# Altium PCB AB_Amplifier.PcbDoc
Units mil, origin at the board's own origin, x right, y up, seen from the top; angles counter-clockwise.
Board outline 2973.75 x 1470 mil, 2 copper layers (Top Layer, Bottom Layer); 24 components, 15 nets, 53 pads, 0 vias.
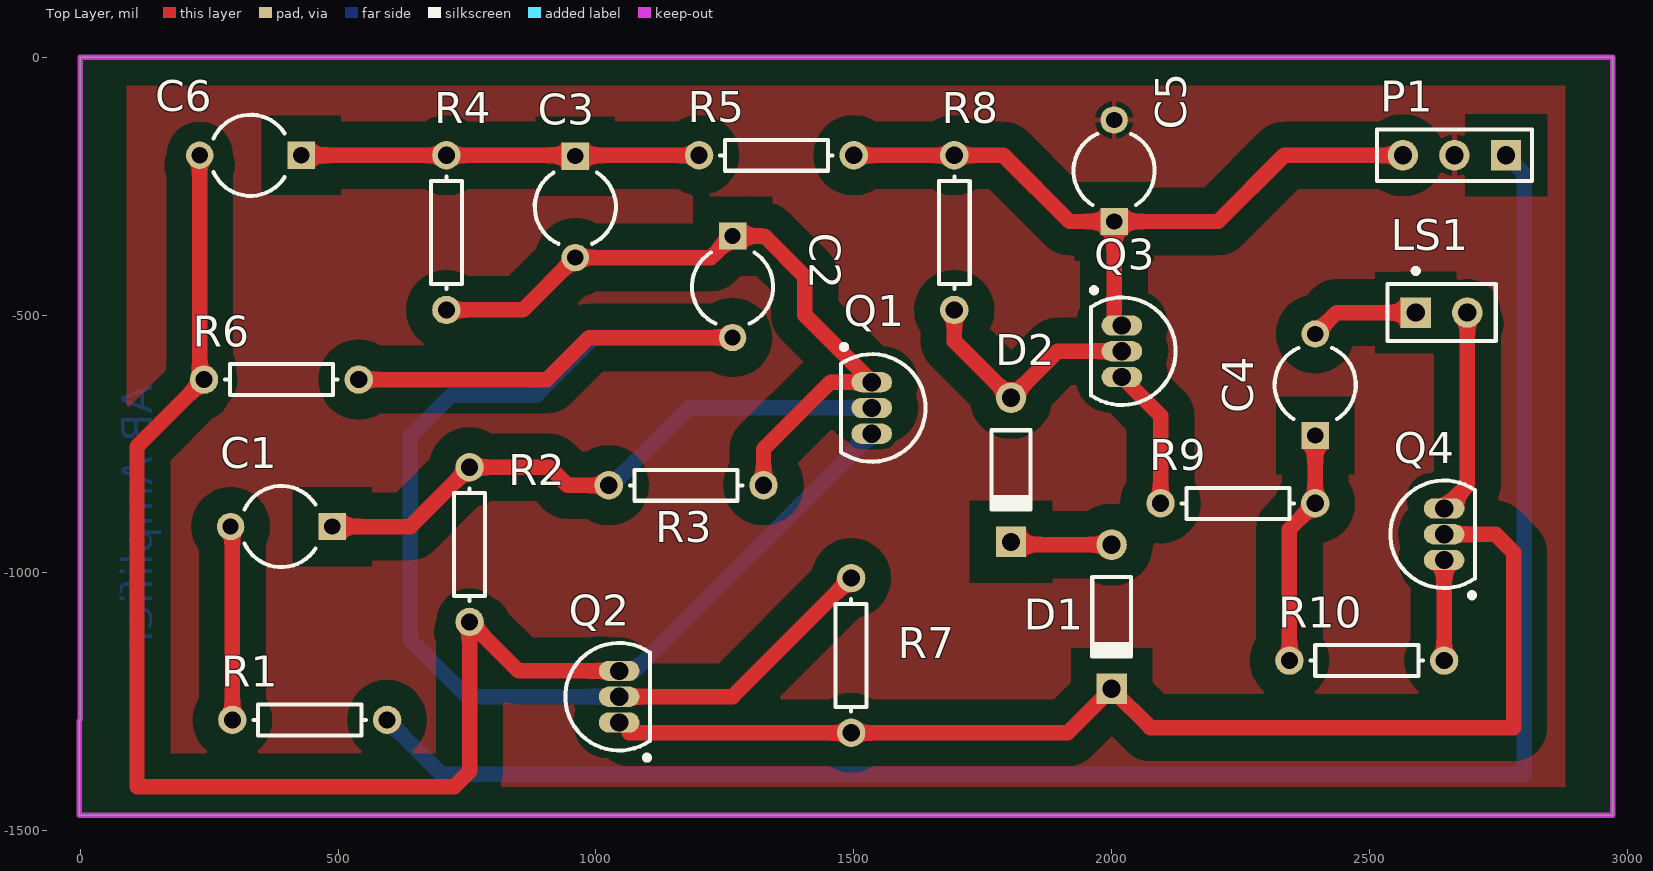
[diagram p0: Top Layer view]
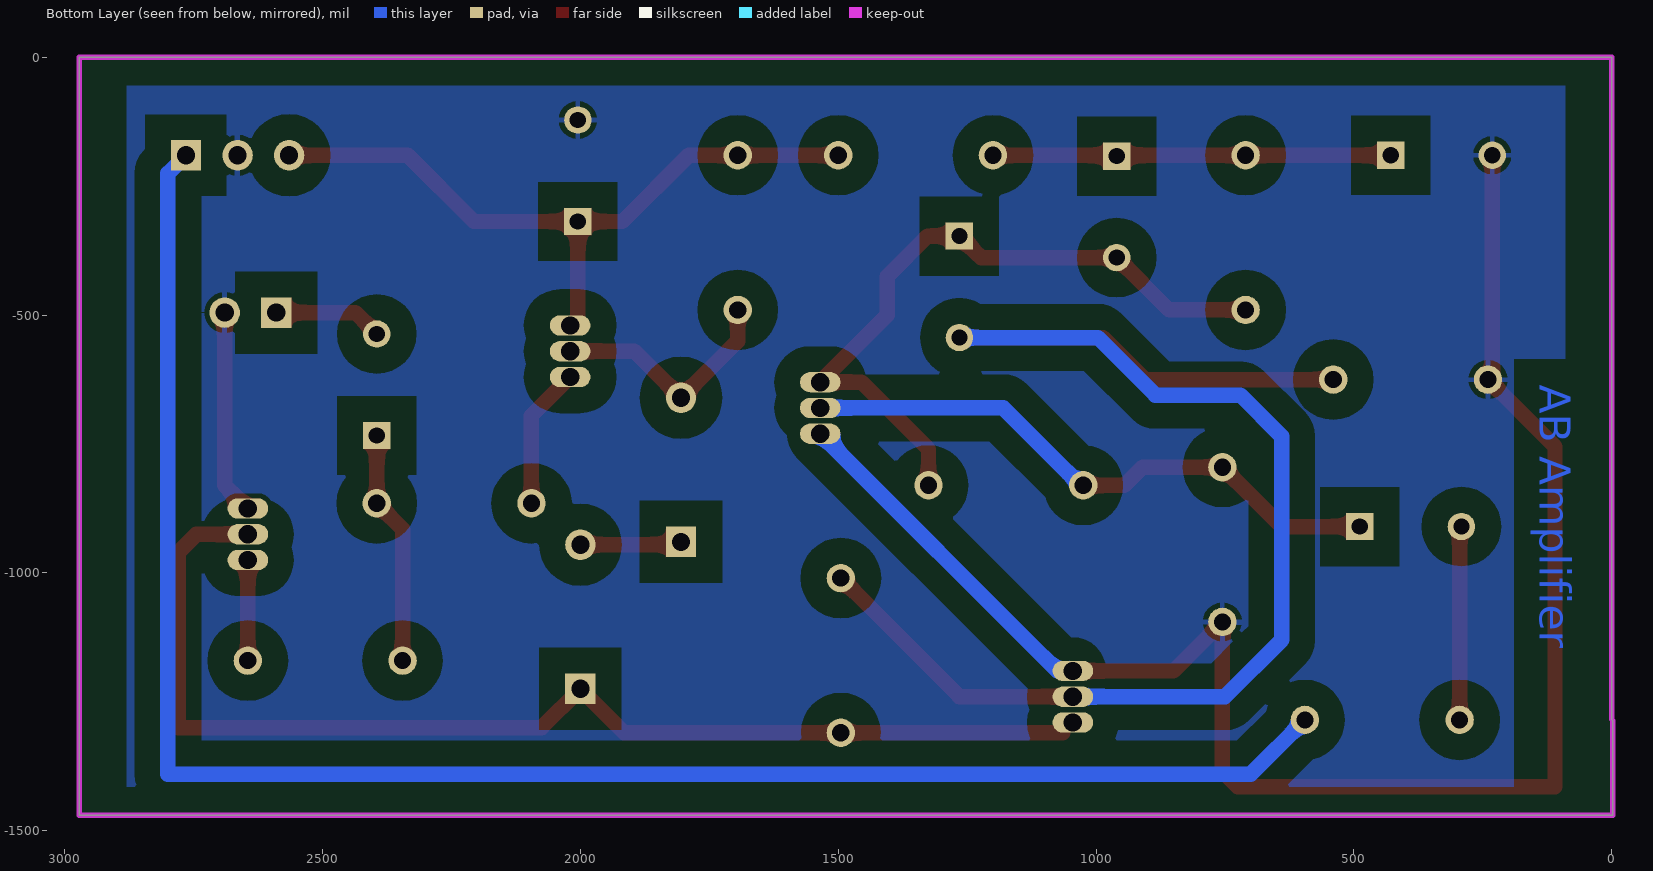
[diagram p1: Bottom Layer view, seen from below]

## Layer stack, top to bottom
Top Solder: solder mask 0.4, Solder Resist, Dk 3.5
Top Layer: signal copper 1.4
Dielectric 1: dielectric 12.6, FR-4, Dk 4.8
Bottom Layer: signal copper 1.4
Bottom Solder: solder mask 0.4, Solder Resist, Dk 3.5

## Board outline
-1.88,-1470 -1.88,-1286.25 0,-1284.38 0,0 2971.88,0 2971.88,-1470

## Design rules (kind name [scope] priority, off if disabled: settings)
Clearance "Copper Pour" [InPolygon] p1: gap=50
Clearance [All] p2: gap=10
PolygonConnect [All] p1: connectstyle=Relief reliefconductorwidth=10 reliefentries=4 polygonreliefangle="90 Angle" airgapwidth=10
RoutingVias [All] p1: holewidth=28 width=50 viastyle="Through Hole" minholewidth=28 minwidth=50 maxholewidth=28 maxwidth=50
SolderMaskExpansion [All] p1: expansion=4
Width "GND net width" [InNet('GND')] p1: maxlimit=30 minlimit=10 preferedwidth=30
Width [All] p2: maxlimit=30 minlimit=30 preferedwidth=30
30 further rules are at their usual default settings.

## Components (designator, comment, footprint, x,y, rotation, side; value= is the part's Value field where it differs from the comment)
C1 "Cap Pol1" CAPR5-4X5 390,-910 r180 top
C2 "Cap Pol1" CAPR5-4X5 1265,-445 r270 top
C3 "Cap2" CAPR5-4X5 960,-290 r270 top
C4 "Cap Pol1" CAPR5-4X5 2395,-635 r90 top
C5 "Cap Pol1" CAPR5-4X5 2005,-220 r90 top
C6 "Cap Pol1" CAPR5-4X5 330,-190 r180 top
D1 "1N4148" DO-35 2000,-1085 r270 top
D2 "1N4148" DO-35 1805,-800 r270 top
LS1 "Speaker" PIN2 2590,-495 r0 top
P1 "Header 3" HDR1X3 2765,-190 r180 top
Q1 "2N2222" TO-226-AA 1535,-680 r180 top
Q2 "2N2222" TO-226-AA 1045,-1240 r0 top
Q3 "2N2222" TO-226-AA 2020,-570 r180 top
Q4 "2N2907" TO-226-AA 2645,-925 r0 top
R1 "Res1" AXIAL-0.3 445,-1285 r180 top
R2 "Res1" AXIAL-0.3 755,-945 r90 top
R3 "Res1" AXIAL-0.3 1175,-830 r180 top
R4 "Res1" AXIAL-0.3 710,-340 r270 top
R5 "Res1" AXIAL-0.3 1350,-190 r0 top
R6 "Res1" AXIAL-0.3 390,-625 r180 top
R7 "Res1" AXIAL-0.3 1495,-1160 r90 top
R8 "Res1" AXIAL-0.3 1695,-340 r90 top
R9 "Res1" AXIAL-0.3 2245,-865 r0 top
R10 "" AXIAL-0.3 2495,-1170 r180 top

## Footprints (in the part's own frame and the unit in brackets; to place one, negate y for a bottom-side part, rotate by r counter-clockwise, add the part's x,y. Pads: shape width x height; smd on the part's side, far side on the other; paste and mask are expansions set on the pad)
AXIAL-0.3 [mm] "Axial Device, Thru-Hole; 2 Leads; 0.3 in Pin Spacing"
  round 1.4 hole 0.85: 1(-3.81,0) 2(3.81,0)
  silkscreen extent -2.77,-0.76 2.77,0.76
CAPR5-4X5 [mm] "Capacitor; 2 Leads"
  rect 1.35x1.35 hole 0.8: 1(-2.5,0)
  round 1.35 hole 0.8: 2(2.5,0)
  silkscreen extent -1.69,-2 1.82,2
DO-35 [mm] "Diode, Axial; Body 3.8 x 1.9 mm (LxDia. max), Lead Dia. 0.53 mm (max)"
  round 1.5 hole 0.9: 1(-3.55,0)
  rect 1.5x1.5 hole 0.9: 2(3.55,0)
  silkscreen extent -1.95,-0.95 2.05,0.95
HDR1X3 [mm] "Connector; Header; 3 Position"
  rect 1.5x1.5 hole 0.9: 1(0,0)
  round 1.5 hole 0.9: 2(2.54,0) 3(5.08,0)
  silkscreen extent -1.27,-1.27 6.35,1.27
PIN2 [mm] "Photosensitive Diode; 2 Leads"
  rect 1.5x1.5 hole 0.9: 1(0,0)
  round 1.5 hole 0.9: 2(2.54,0)
  silkscreen extent -1.4,-1.4 3.94,2.17
TO-226-AA [mm] "TO, Flat Index; 3 In-Line, Axial Leads; Body Dia. 4.8mm; Leads 0.55 x 0.51 mm (max)"
  oval 2x1 hole 0.9: 1(0,-1.27) 2(0,0) 3(0,1.27)
  silkscreen extent -2.65,-3.13 1.52,2.65, body extent -2.65,-2.66 1.52,2.66, height 5.33

## Part data
C1 C2 C4 C5 C6: "Polarized Capacitor (Radial)"
C3: "Capacitor"
D1 D2: library part "Diode 1N4148", "High Conductance Fast Diode"
LS1: "Loudspeaker"
P1: "Header, 3-Pin"
Q1 Q2 Q3: library part NPN, "NPN Bipolar Transistor"
Q4: library part PNP, "PNP Bipolar Transistor"
R1 R2 R3 R4 R5 R6 R7 R8 R9: "Resistor"
R10: library part Res1, "Resistor"

## Nets (pads, with @x,y where several pads share a name; then routed paths per layer and width w, separated by ;. In a path a pad name is that pad's centre, name@x,y a point inside that pad or via, vN(x,y) a via of type N, cw(c..) or ccw(c..) an arc to the next point about the centre after c; other vN are vias at no path point)
"AUDIO IN": P1.1 R1.1 | length 3463
  Bottom Layer w30: R1.1 700,-1390 2800,-1390 2800,-225 P1.1
GND: C5.2 C6.2 LS1.2 P1.2 Q1.3 Q2.3 Q4.3 R2.1 R6.2 | length 3626.4
  Top Layer w30: R6.2@231.57,-616.57 C6.2 ; R6.2 110,-755 110,-1415 725,-1415 755,-1385 R2.1 850,-1190 Q2.3 ; Q4.3 2690,-830 LS1.2
  Bottom Layer w30: Q2.3 1075,-1190 Q1.3
NetC1_1: C1.1 Q1.2 R2.2 R3.2 | length 1170.8
  Top Layer w30: C1.1 640,-910 R2.2 910,-795 945,-830 R3.2
  Bottom Layer w30: R3.2 1030,-830 1180,-680 Q1.2
NetC1_2: C1.2 R1.2 | length 371.6
  Top Layer w30: R1.2 C1.2@295,-913.43
NetC2_1: C2.1 C3.2 Q1.1 R3.1 R4.2 | length 1379.6
  Top Layer w30: R4.2 858.43,-490 C3.2 1223.15,-388.43 C2.1 1326.57,-346.57 1405,-425 1405,-500 Q1.1 1455,-630 1325,-760 R3.1
NetC2_2: C2.2 Q2.2 R6.1 R7.2 | length 2854
  Top Layer w30: R6.1 905,-625 986.57,-543.43 C2.2 ; Q2.2 1265,-1240 R7.2
  Bottom Layer w30: Q2.2 750,-1240 640,-1130 640,-735 720,-655 885,-655 996.57,-543.43 C2.2
NetC3_1: C3.1 C6.1 R4.1 R5.1 | length 771.6
  Top Layer w30: C6.1 R4.1 R5.1
NetC4_1: C4.1 R9.2 R10.2 | length 457.3
  Top Layer w30: R10.2 2345,-915 R9.2 C4.1
NetC4_2: C4.2 LS1.1 | length 212.2
  Top Layer w30: C4.2 2436.57,-495 LS1.1
NetD1_1: D1.1 D2.2 | length 189.5
  Top Layer w30: D2.2@1810.47,-945.24 D1.1
NetD1_2: D1.2 Q2.1 Q4.2 R7.1 | length 2271
  Top Layer w30: 1065,-1310 R7.1 1914.76,-1310 D1.2 2075.24,-1300 2780,-1300 2780,-960 2745,-925 Q4.2
NetD2_1: D2.1 Q3.2 R8.1 | length 468.2
  Top Layer w30: R8.1 1695,-550.24 D2.1 1895.24,-570 Q3.2
NetQ3_3: Q3.3 R9.1 | length 276.1
  Top Layer w30: Q3.3 2095,-695 R9.1
NetQ4_1: Q4.1 R10.1 | length 195
  Top Layer w30: R10.1 Q4.1
VCC: C5.1 P1.3 Q3.1 R5.2 R8.2 | length 1379.2
  Top Layer w30: R5.2 R8.2 1790,-190 1918.43,-318.43 C5.1 ; Q3.1 2005,-505 C5.1 ; P1.3 2335,-190 2206.57,-318.43 C5.1

## Polygon pours and split planes (outlines as drawn)
GND on Top Layer "GND_L01_P002" (solid, pour order 2): 90,0 2880,0 2880,-1470 90,-1470 90,0
GND on Bottom Layer "GND_L02_P004" (solid, pour order 4): 90,0 2880,0 2880,-1470 90,-1470 90,-5 90,0

## Keep-outs
Keep-Out Layer:
  lines w10: -1.88,-1470 2971.88,-1470 2971.88,-1286.25 2971.88,-1024.38 2971.88,-869.38 2971.88,-790 2971.88,-663.75 2971.88,-600.62 2971.88,-445.62 2971.88,-183.75 2971.88,0 0,0 0,-457.5 0,-1012.5 0,-1284.38 -1.88,-1286.25 -1.88,-1470

## Other copper
Bottom Layer:
  text "AB Amplifier" at 140,-635 h60 r90